# Altium PCB KeyBesselPCB.PcbDoc
Units mm, origin at the board's own origin, x right, y up, seen from the top; angles counter-clockwise.
Board outline 70 x 50 mm, 2 copper layers (Top Layer, Bottom Layer); 26 components, 19 nets, 68 pads, 4 vias.
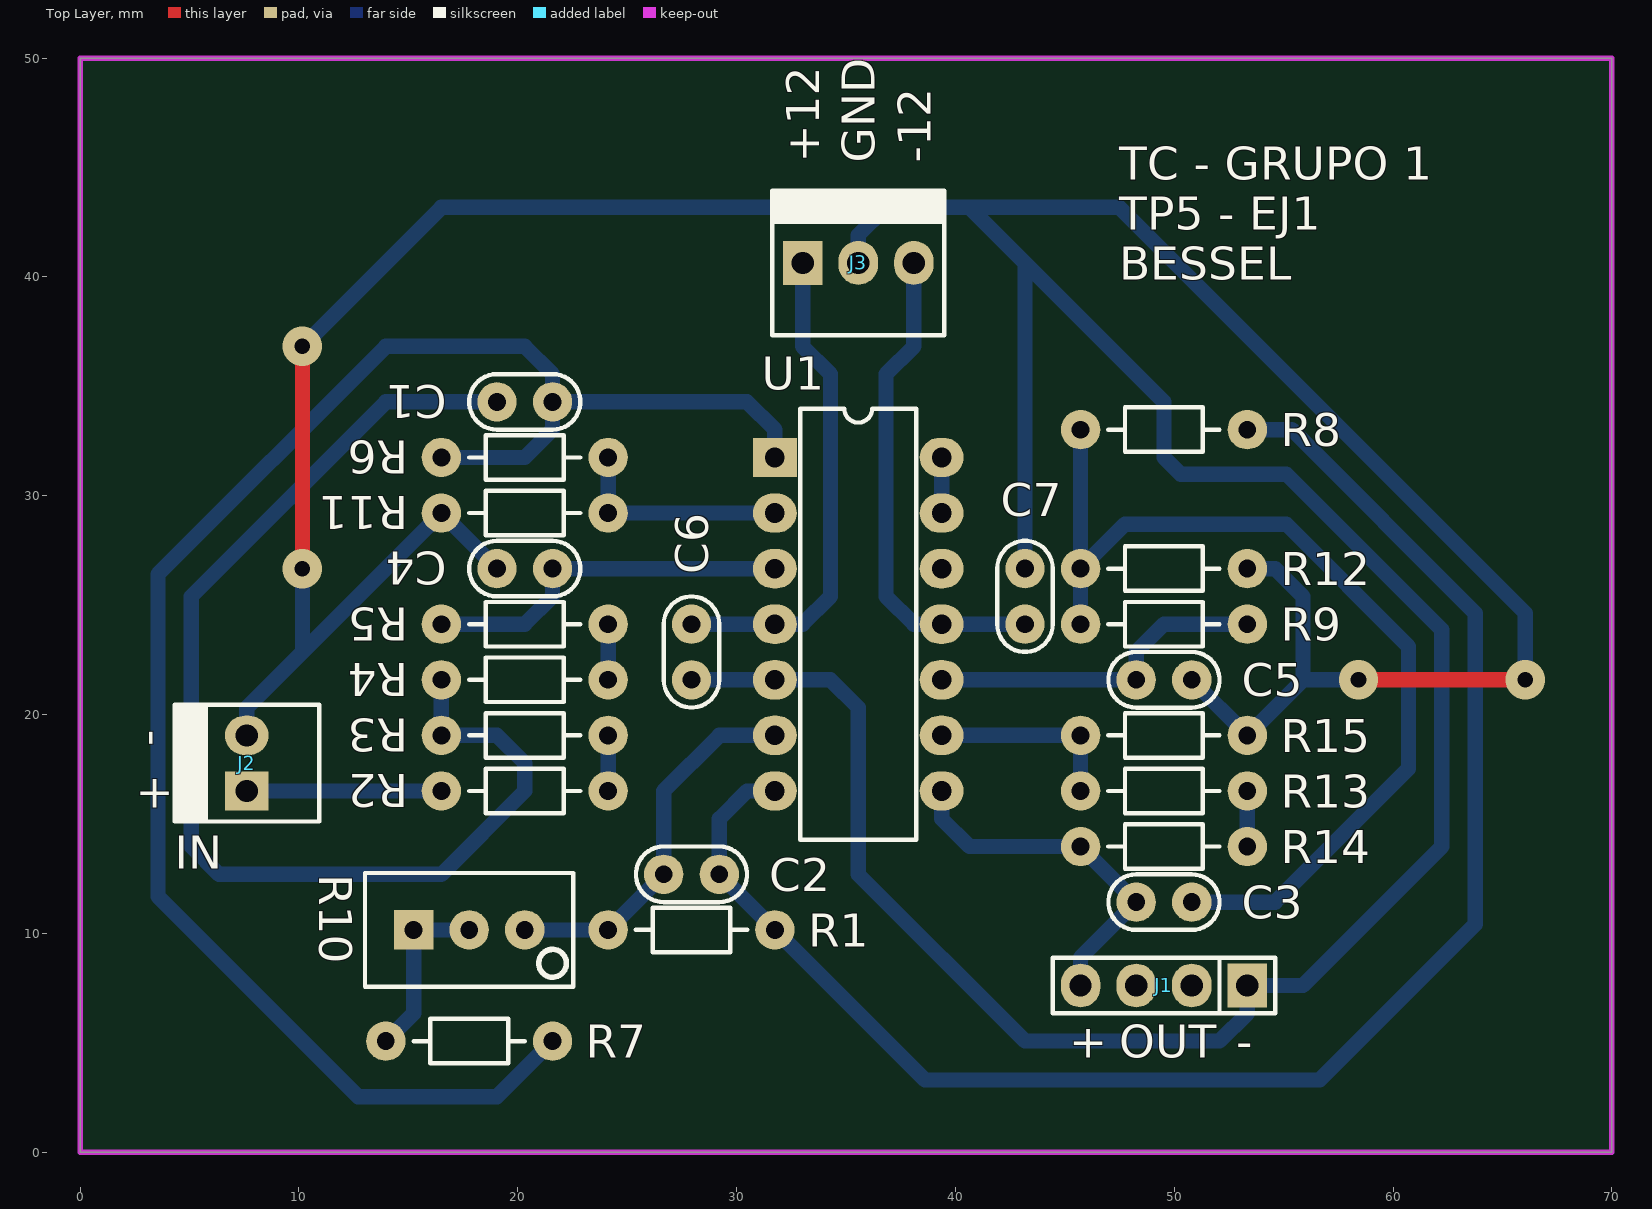
[diagram p0: Top Layer view]
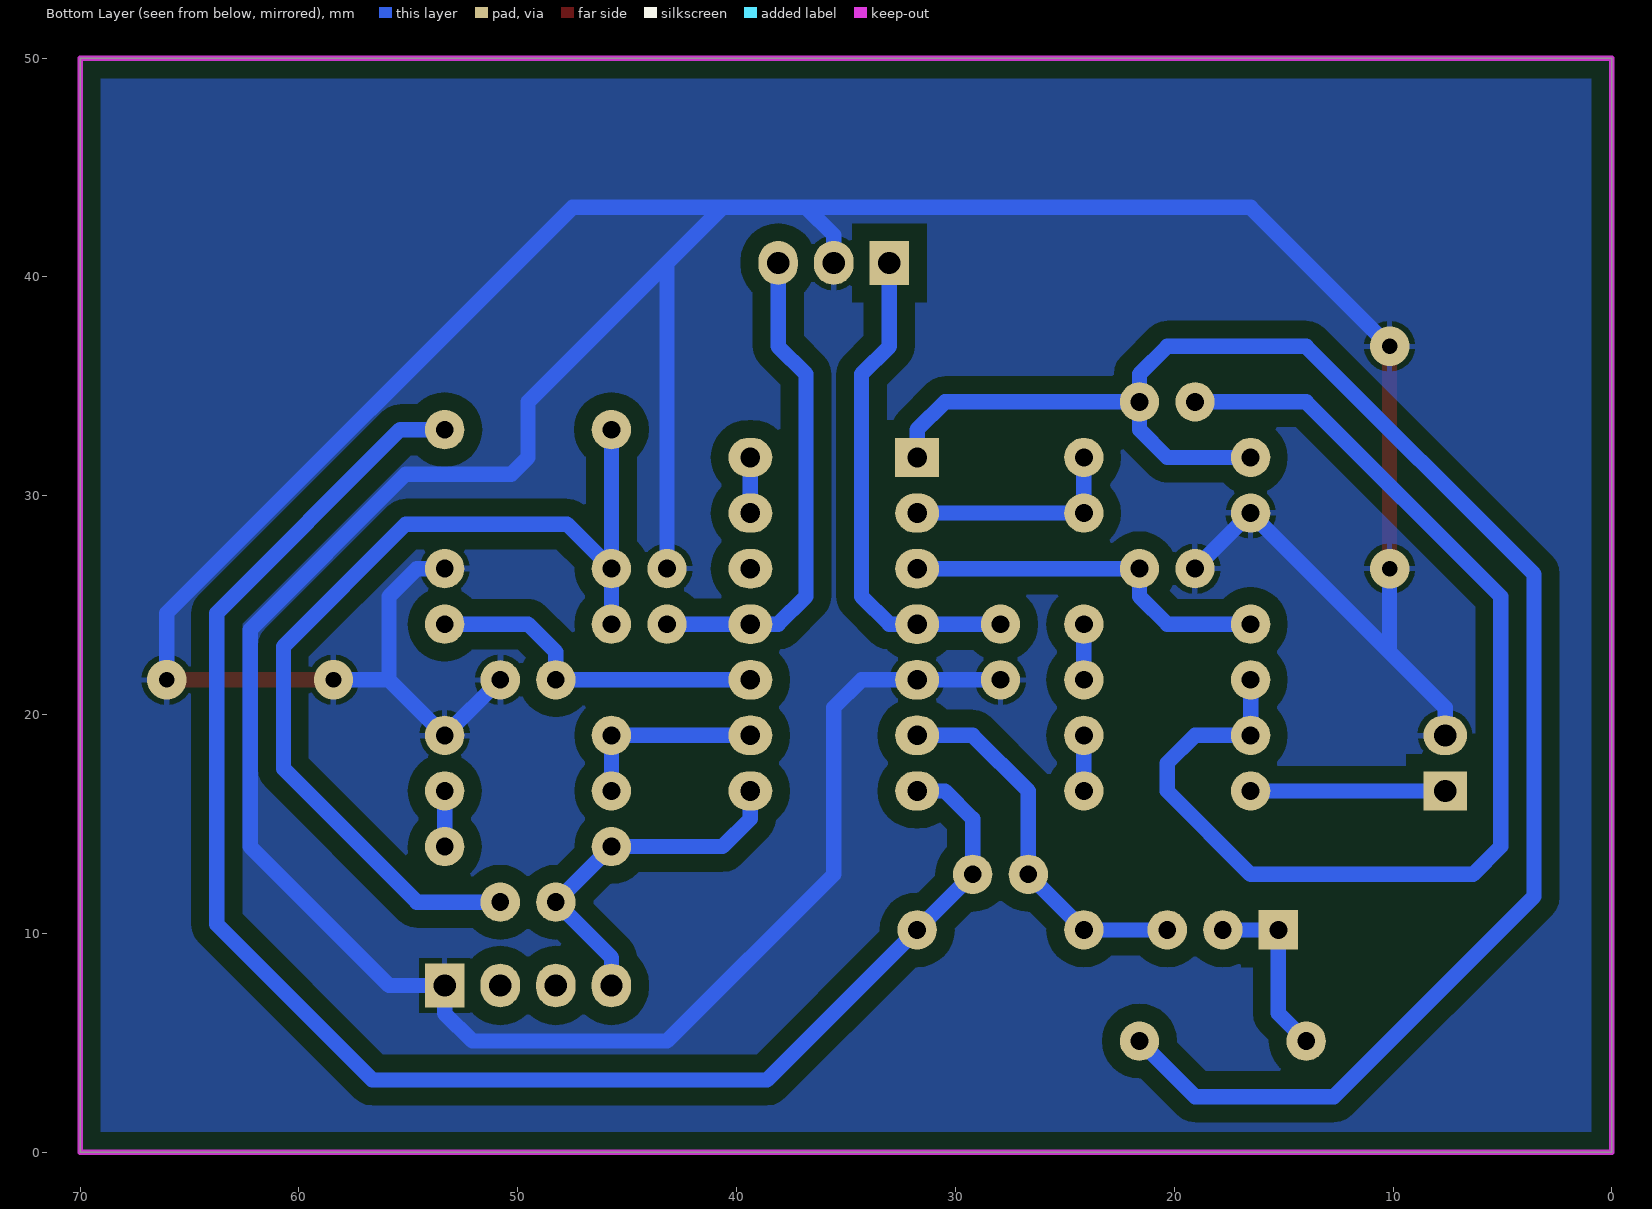
[diagram p1: Bottom Layer view, seen from below]
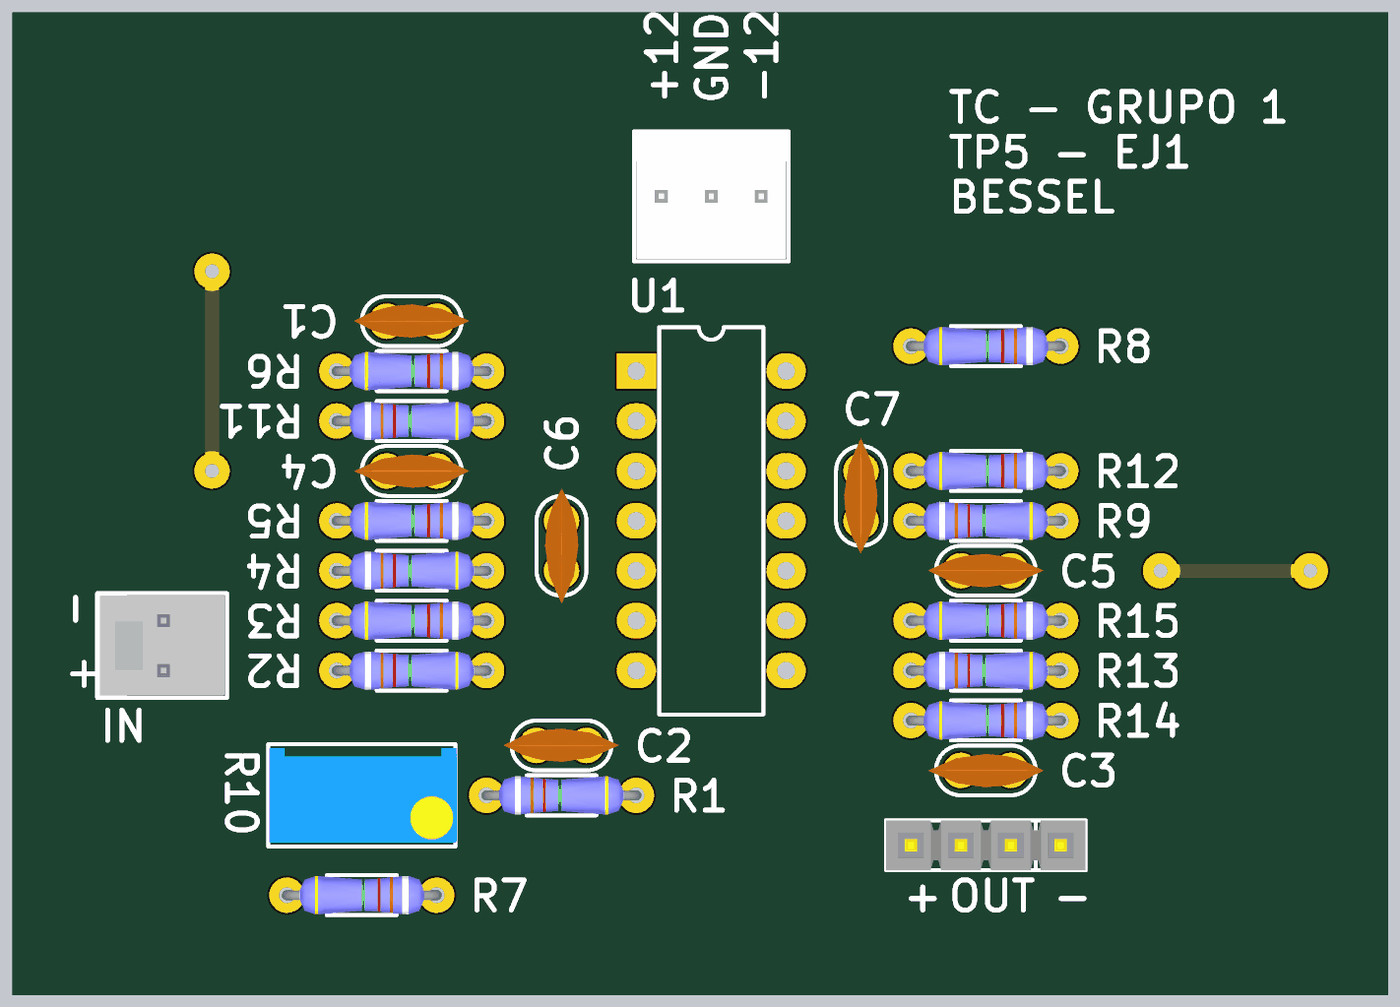
[diagram p2: 3D render of the assembled board from above, using the file's embedded part models]

## Layer stack, top to bottom
Top Solder: solder mask 0.0102, Solder Resist, Dk 3.5
Top Layer: signal copper 0.0356
Dielectric 1: dielectric 0.32, FR-4, Dk 4.8
Bottom Layer: signal copper 0.0356
Bottom Solder: solder mask 0.0102, Solder Resist, Dk 3.5

## Board outline
0,0 0,50 70,50 70,0

## Design rules (kind name [scope] priority, off if disabled: settings)
Clearance [All] p1: gap=0.7
PolygonConnect [All] p1: connectstyle=Relief reliefconductorwidth=0.254 reliefentries=4 polygonreliefangle="90 Angle" airgapwidth=0.254
RoutingVias [All] p1: holewidth=0.711 width=1.8 viastyle="Through Hole" minholewidth=0.711 minwidth=1.8 maxholewidth=0.711 maxwidth=1.8
SolderMaskExpansion [All] p1: expansion=0.102
Width [All] p1: maxlimit=0.7 minlimit=0.7 preferedwidth=0.7
30 further rules are at their usual default settings.

## Components (designator, comment, footprint, x,y, rotation, side; value= is the part's Value field where it differs from the comment)
C1 "1n" CAP100 20.32,34.29 r0 top
C2 "100n" CAP100 27.94,12.7 r0 top
C3 "100n" CAP100 49.53,11.43 r180 top
C4 "1n" CAP100 20.32,26.67 r180 top
C5 "100n" CAP100 49.53,21.59 r0 top
C6 "100n" CAP100 27.94,22.86 r270 top
C7 "100n" CAP100 43.18,25.4 r90 top
J1 "VOUT" SIP4 49.53,7.62 r180 top
J2 "IN" MOLEX2 7.62,16.51 r90 top
J3 "FUENTE" MOLEX3 33.02,40.64 r0 top
R1 "1K8" RES300 24.13,10.16 r0 top
R2 "150K" RES300 16.51,16.51 r0 top
R3 "22K" RES300 24.13,19.05 r180 top
R4 "150K" RES300 16.51,21.59 r0 top
R5 "22K" RES300 24.13,24.13 r180 top
R6 "2K2" RES300 24.13,31.75 r180 top
R7 "2K2" RES300 21.59,5.08 r180 top
R8 "2K2" RES300 53.34,33.02 r180 top
R9 "1K5" RES300 45.72,24.13 r0 top
R10 "1K" "PRESET V" 17.78,10.16 r0 top
R11 "10K" RES300 16.51,29.21 r0 top
R12 "4K7" RES300 53.34,26.67 r180 top
R13 "1K" RES300 45.72,16.51 r0 top
R14 "1K" RES300 53.34,13.97 r180 top
R15 "2K2" RES300 53.34,19.05 r180 top
U1 "TL084ACN" 646-06 35.56,24.13 r270 top

## Footprints (in the part's own frame and the unit in brackets; to place one, negate y for a bottom-side part, rotate by r counter-clockwise, add the part's x,y. Pads: shape width x height; smd on the part's side, far side on the other; paste and mask are expansions set on the pad)
646-06 [mm] "DIP; 14 Leads; Row Spacing 7.62 mm; Pitch 2.54 mm"
  rect 1.8x2 hole 0.9: 1(-7.62,-3.81)
  oval 1.8x2 hole 0.9: 2(-5.08,-3.81) 3(-2.54,-3.81) 4(0,-3.81) 5(2.54,-3.81) 6(5.08,-3.81) 7(7.62,-3.81) 8(7.62,3.81) 9(5.08,3.81) 10(2.54,3.81) 11(0,3.81) 12(-2.54,3.81) 13(-5.08,3.81) 14(-7.62,3.81)
  silkscreen extent -9.85,-2.65 9.85,2.65
CAP100 [mm]
  round 1.8 hole 0.813: 1(-1.27,0) 2(1.27,0)
  silkscreen extent -2.54,-1.27 2.54,1.27, body extent -2.92,-0.84 2.92,0.86, height 6.12
MOLEX2 [mm]
  rect 1.8x2 hole 1.016: 1(0,0)
  oval 1.8x2 hole 1.016: 2(2.54,0)
  silkscreen extent -1.4,-3.3 3.94,3.3, body extent -1.27,-3.17 3.81,3.18, height 10.74
MOLEX3 [mm]
  rect 1.8x2 hole 1.016: 1(0,0)
  oval 1.8x2 hole 1.016: 2(2.54,0) 3(5.08,0)
  silkscreen extent -1.4,-3.3 6.48,3.3, body extent -1.27,-3.17 6.35,3.17, height 10.74
"PRESET V" [mm]
  rect 1.8x1.8 hole 0.813: 1(-2.54,0)
  round 1.8 hole 0.813: 2(0,0) 3(2.54,0)
  silkscreen extent -4.76,-2.6 4.76,2.6, body extent -4.7,-2.42 4.83,2.42, height 11.55
RES300 [mm]
  round 1.8 hole 0.813: 1(0,0) 2(7.62,0)
  silkscreen extent 1.27,-1.02 6.35,1.02, body extent -0.25,-0.97 7.87,0.97, height 2.01
SIP4 [mm]
  rect 1.8x2 hole 1.016: 1(-3.81,0)
  oval 1.8x2 hole 1.016: 2(-1.27,0) 3(1.27,0) 4(3.81,0)
  silkscreen extent -5.08,-1.27 5.08,1.27, body extent -5.08,-1.27 5.08,1.27, height 8.38

## Part data
C1 C2 C3 C4 C5 C6 C7: library part CAP
J1: library part CON4
J2: library part MOLEX2
J3: library part MOLEX3
R1 R2 R3 R4 R5 R6 R7 R8 R9 R11 R12 R13 R14 R15: library part RES
R10: library part PRESET
U1: "JFET-Input Operational Amplifier"

## Via types
v1: diameter 1.8, hole 0.711, Top Layer to Bottom Layer, 4 vias

## Nets (pads, with @x,y where several pads share a name; then routed paths per layer and width w, separated by ;. In a path a pad name is that pad's centre, name@x,y a point inside that pad or via, vN(x,y) a via of type N, cw(c..) or ccw(c..) an arc to the next point about the centre after c; other vN are vias at no path point)
+12V: C6.1 J3.1 U1.4 | length 22.6
  Bottom Layer w0.7: C6.1 U1.4 33.02,24.13 34.29,25.4 34.29,35.56 33.02,36.83 J3.1
-12V: C7.1 J3.3 U1.11 | length 22.6
  Bottom Layer w0.7: J3.3 38.1,36.83 36.83,35.56 36.83,25.4 38.1,24.13 U1.11 C7.1
GND: C4.2 C5.2 C6.2 C7.2 J1.1 J2.2 J3.2 R11.1 R12.1 R15.1 U1.5 | length 232.9
  Top Layer w0.7: v1(10.16,26.67) v1(10.16,36.83) ; v1(58.42,21.59) v1(66.04,21.59)
  Bottom Layer w0.7: J2.2 7.62,20.32 10.16,22.86 ; v1(10.16,26.67) 10.16,22.86 ; v1(10.16,36.83) 16.51,43.18 36.83,43.18 ; C4.2 R11.1 10.16,22.86 ; C6.2 U1.5 34.29,21.59 35.56,20.32 35.56,12.7 43.18,5.08 52.07,5.08 53.34,6.35 J1.1 55.88,7.62 62.23,13.97 62.23,23.876 55.118,30.988 50.292,30.988 49.53,31.75 49.53,34.29 43.18,40.64 ; J3.2 35.56,41.91 36.83,43.18 ; C7.2 43.18,40.64 ; C5.2 R15.1 55.88,21.59 ; R12.1 54.61,26.67 55.88,25.4 55.88,21.59 ; v1(58.42,21.59) 55.88,21.59 ; v1(66.04,21.59) 66.04,24.638 47.498,43.18 40.64,43.18 ; 36.83,43.18 40.64,43.18 ; 40.64,43.18 43.18,40.64
NetC1_1: C1.1 R3.2 R4.1 | length 54.6
  Bottom Layer w0.7: R4.1 R3.2 19.05,19.05 20.32,17.78 20.32,16.51 16.51,12.7 6.35,12.7 5.08,13.97 5.08,25.4 13.97,34.29 C1.1
NetC1_2: C1.2 R6.2 R7.1 U1.1 | length 80.6
  Bottom Layer w0.7: R6.2 20.32,31.75 21.59,33.02 C1.2 ; R7.1 19.05,2.54 12.7,2.54 3.556,11.684 3.556,26.416 13.97,36.83 20.32,36.83 21.59,35.56 C1.2 ; U1.1 31.75,33.02 30.48,34.29 C1.2
NetC2_1: C2.1 R1.1 R10.3 U1.6 | length 17.3
  Bottom Layer w0.7: R10.3 R1.1 C2.1 26.67,16.51 29.21,19.05 U1.6
NetC2_2: C2.2 R1.2 R8.1 U1.7 | length 75.1
  Bottom Layer w0.7: U1.7 30.48,16.51 29.21,15.24 C2.2 R1.2 38.608,3.302 56.642,3.302 63.754,10.414 63.754,24.638 55.372,33.02 R8.1
NetC3_1: C3.1 R8.2 R9.1 R12.2 | length 45.1
  Bottom Layer w0.7: R9.1 R12.2 ; R8.2 R12.2 ; C3.1 54.61,11.43 60.706,17.526 60.706,23.114 55.118,28.702 47.752,28.702 R12.2
NetC3_2: C3.2 J1.4 R14.2 U1.8 | length 16.6
  Bottom Layer w0.7: U1.8 39.37,15.24 40.64,13.97 R14.2 C3.2 45.72,8.89 J1.4
NetC4_1: C4.1 R5.2 U1.3 | length 17
  Bottom Layer w0.7: R5.2 20.32,24.13 21.59,25.4 C4.1 U1.3
NetC5_1: C5.1 R9.2 U1.10 | length 15.8
  Bottom Layer w0.7: U1.10 C5.1 48.26,22.86 49.53,24.13 R9.2
NetJ2_1: J2.1 R2.1 | length 8.9
  Bottom Layer w0.7: J2.1 R2.1
NetR2_2: R2.2 R3.1 | length 2.5
  Bottom Layer w0.7: R2.2 R3.1
NetR4_2: R4.2 R5.1 | length 2.5
  Bottom Layer w0.7: R4.2 R5.1
NetR6_1: R6.1 R11.2 U1.2 | length 10.2
  Bottom Layer w0.7: R6.1 R11.2 U1.2
NetR7_2: R7.2 R10.1 R10.2 | length 8.1
  Bottom Layer w0.7: R7.2 15.24,6.35 R10.1 R10.2
NetR13_1: R13.1 R15.2 U1.9 | length 8.9
  Bottom Layer w0.7: U1.9 R15.2 R13.1
NetR13_2: R13.2 R14.1 | length 2.5
  Bottom Layer w0.7: R14.1 R13.2
NetU1_13: U1.13 U1.14 | length 2.5
  Bottom Layer w0.7: U1.13 U1.14
pads on no net: J1.2 J1.3 U1.12

## Polygon pours and split planes (outlines as drawn)
GND on Bottom Layer "Top Overlay-No Net" (solid, remove dead copper, pour order 2): 0,50 70,50 70,0 0,0

## Keep-outs
Keep-Out Layer:
  the board outline again, w0.254

## Silkscreen, mask and mechanical layers (free items; w line width, h text height)
Top Overlay:
  text "+12" at 33.782,45.212 h1.52 r90
  text "GND" at 36.322,45.212 h1.52 r90
  text "-12" at 38.862,45.212 h1.52 r90
  text "TC - GRUPO 1" at 47.498,44.45 h1.52
  text "TP5 - EJ1" at 47.498,42.164 h1.52
  text "BESSEL" at 47.498,39.878 h1.52
  text "-" at 3.81,18.542 h1.52 r90
  text "+" at 2.54,15.748 h1.52
  text "IN" at 4.318,12.954 h1.52
  text "+" at 45.212,4.318 h1.52
  text "OUT" at 47.498,4.318 h1.52
  text "-" at 52.832,4.318 h1.52